# Altium PCB PCB1.PcbDoc
Units mm, origin at the board's own origin, x right, y up, seen from the top; angles counter-clockwise.
Board outline 36.58 x 37.97 mm, 4 copper layers (Top Layer, Internal Plane 1, Internal Plane 2, Bottom Layer); 112 components, 31 nets, 572 pads, 88 vias.
Unrouted connection lines stored in the file: 90.
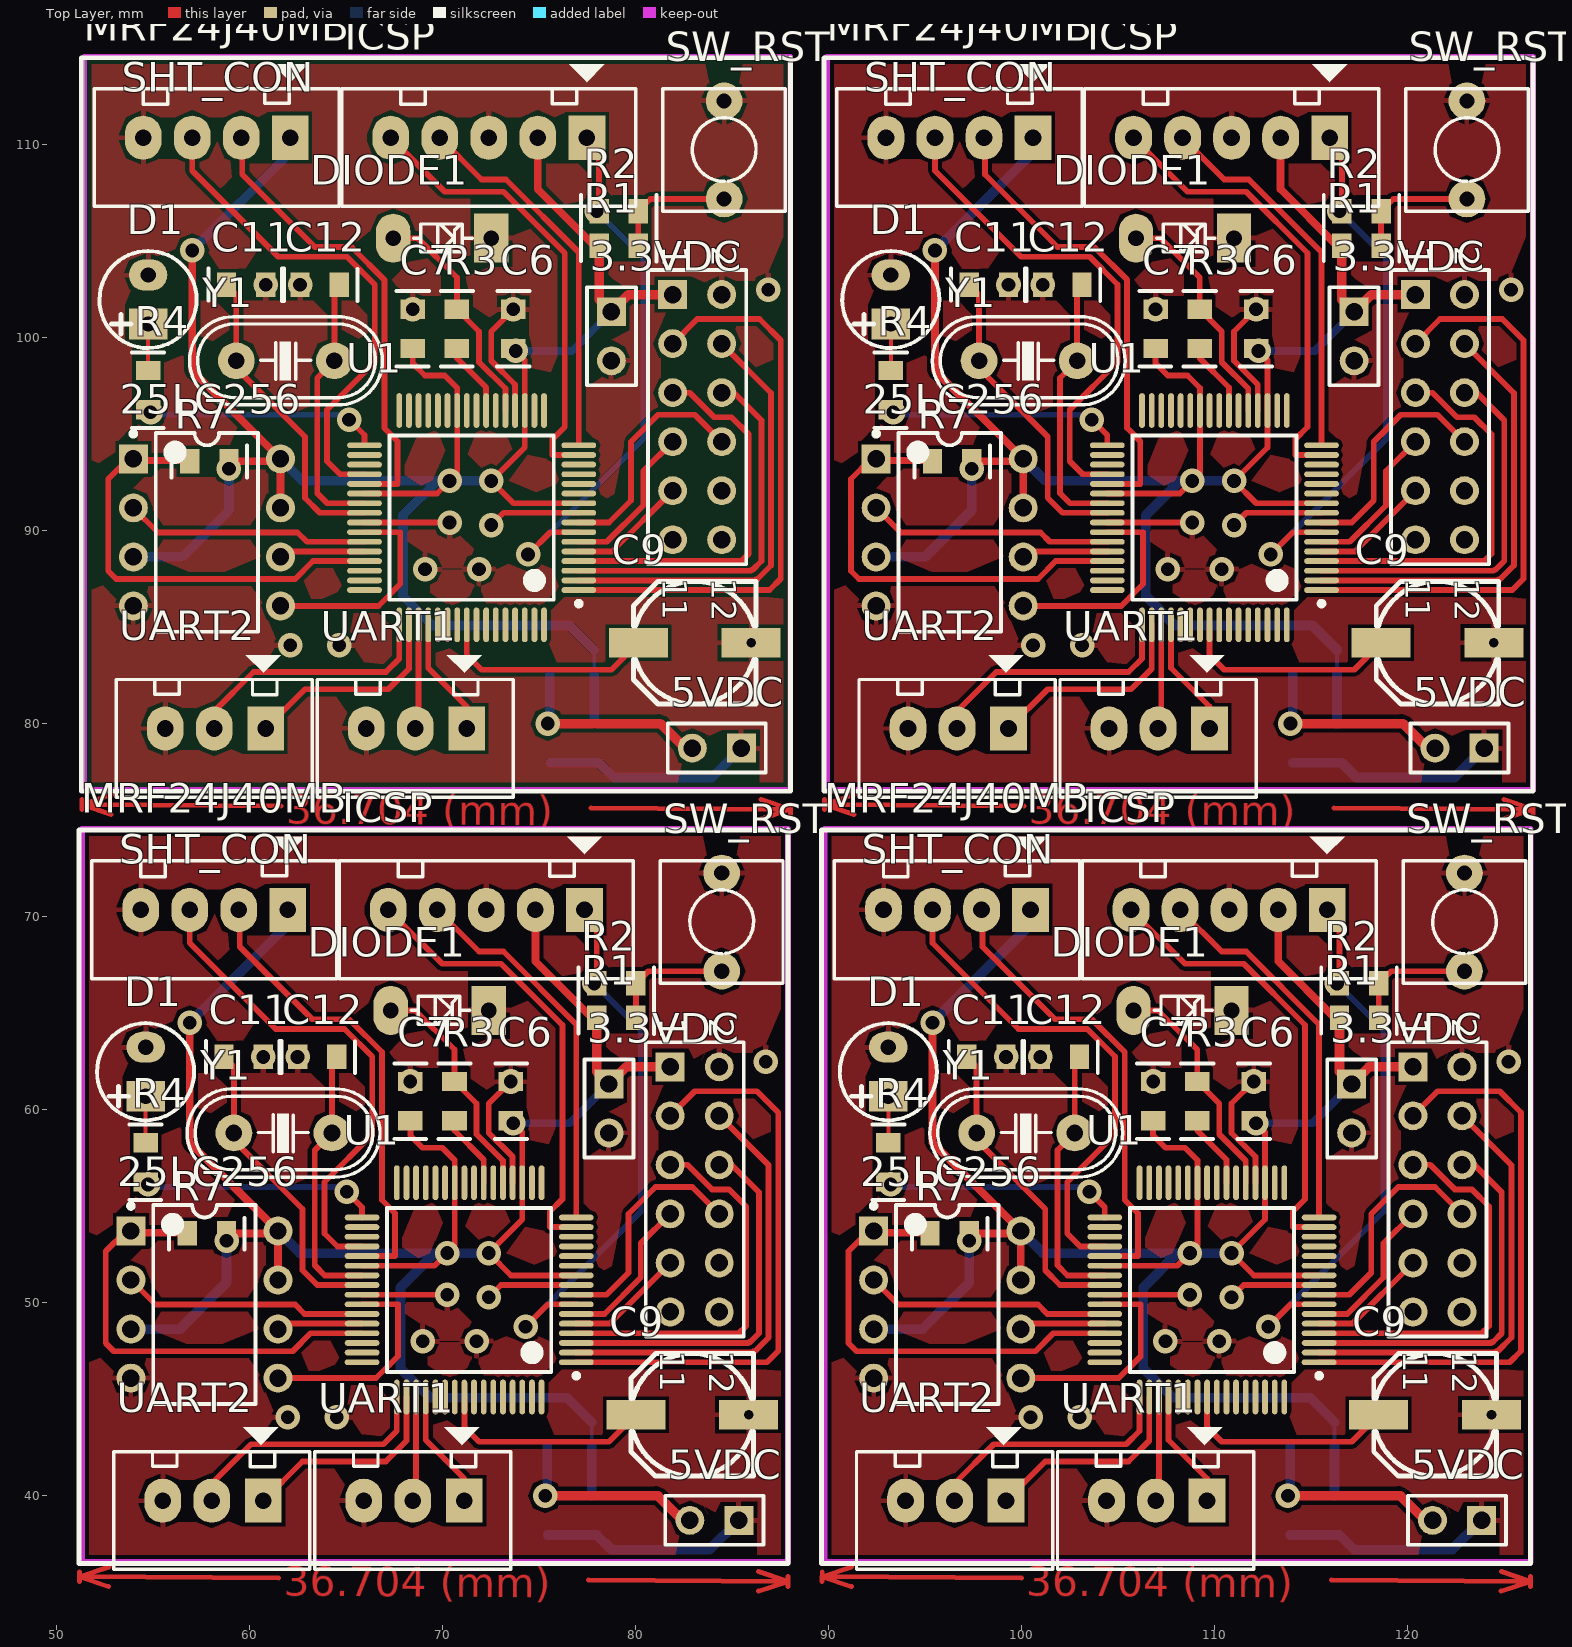
[diagram p0: Top Layer view]
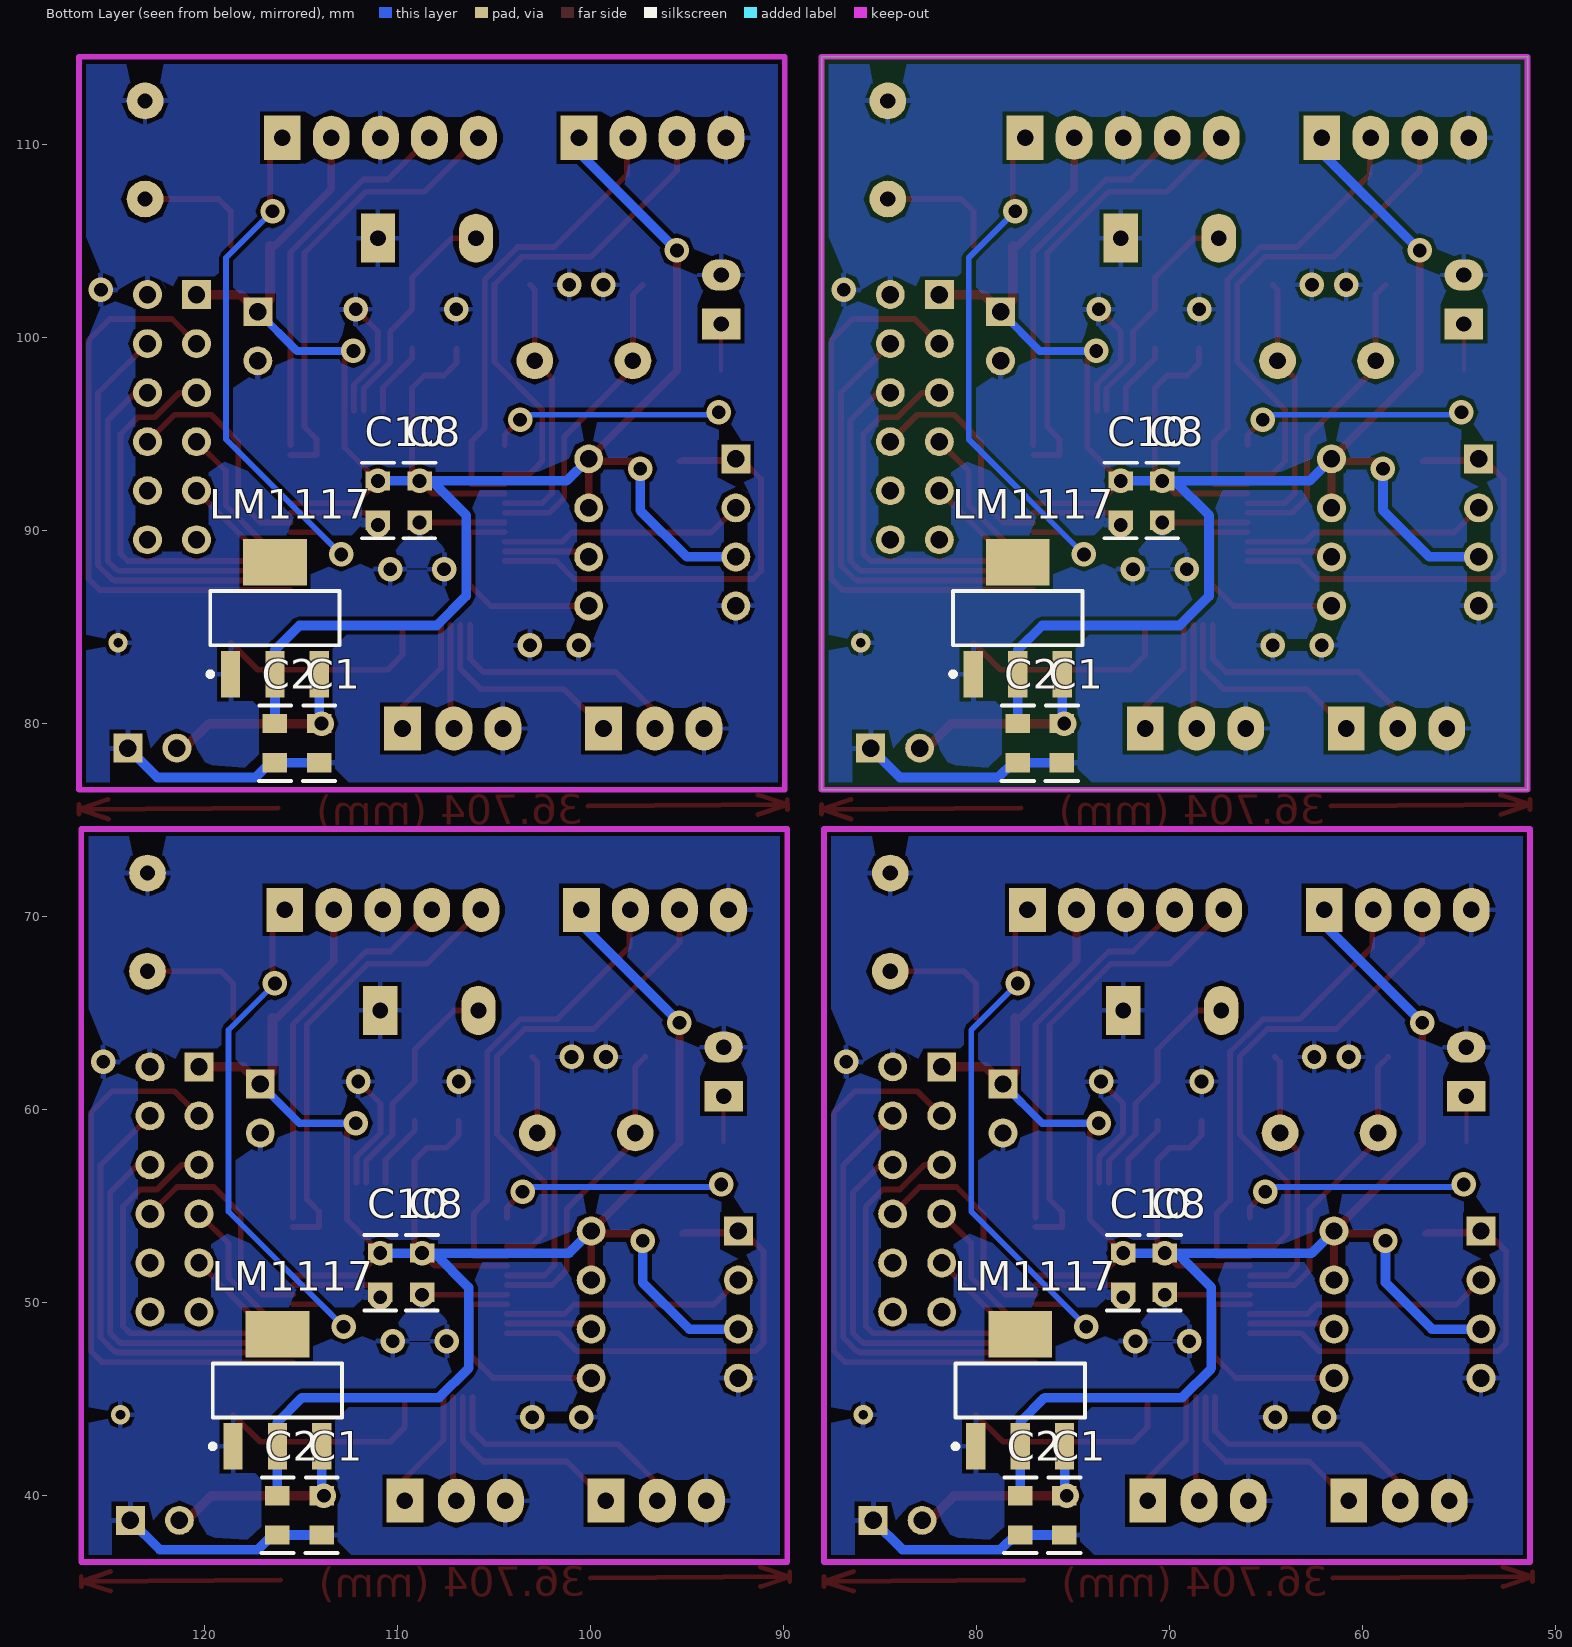
[diagram p1: Bottom Layer view, seen from below]
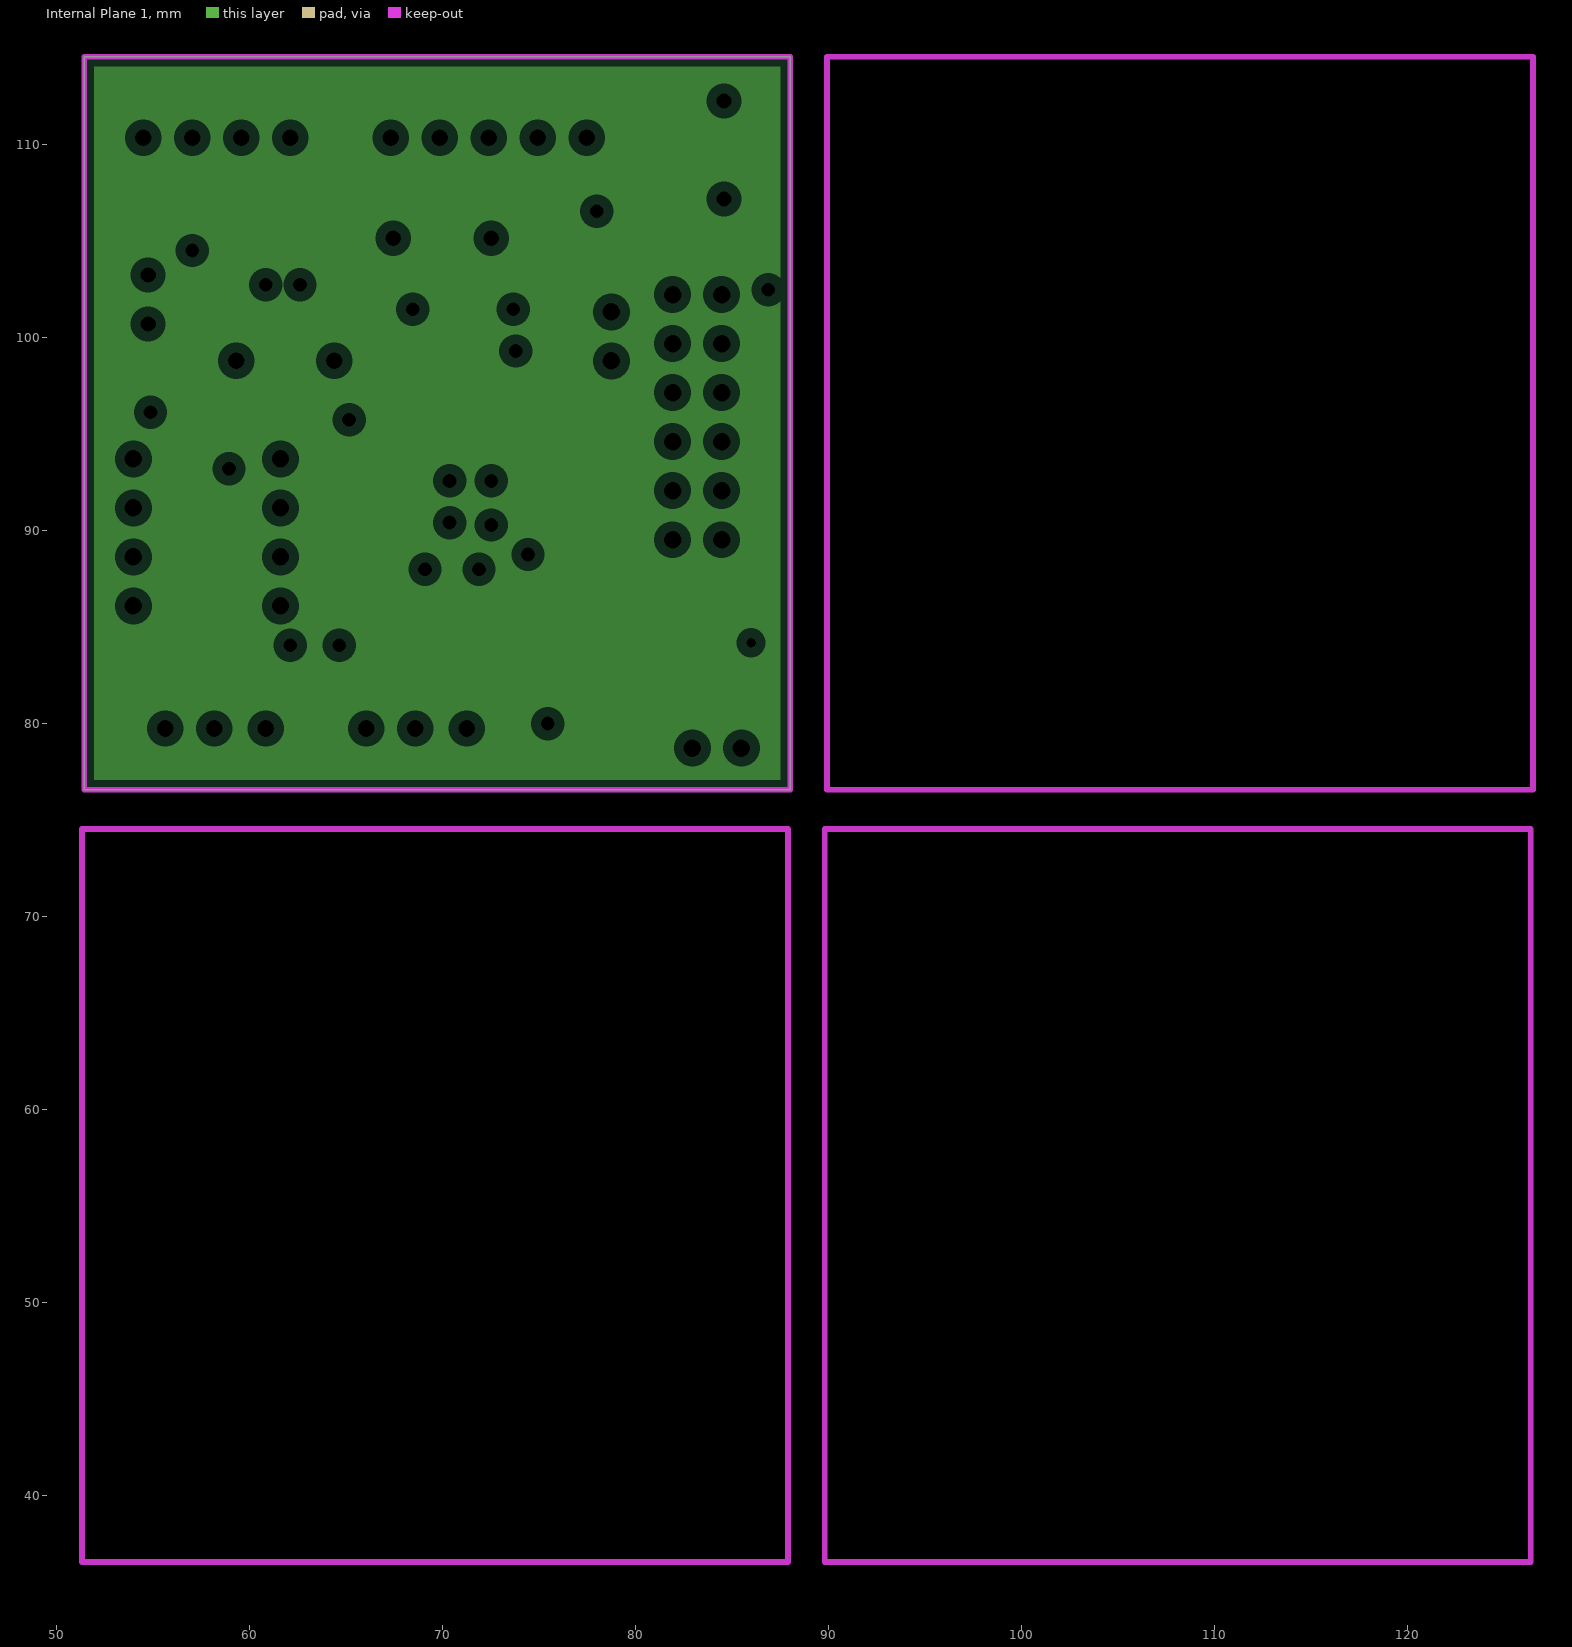
[diagram p2: Internal Plane 1, clearances drawn from the general rule]
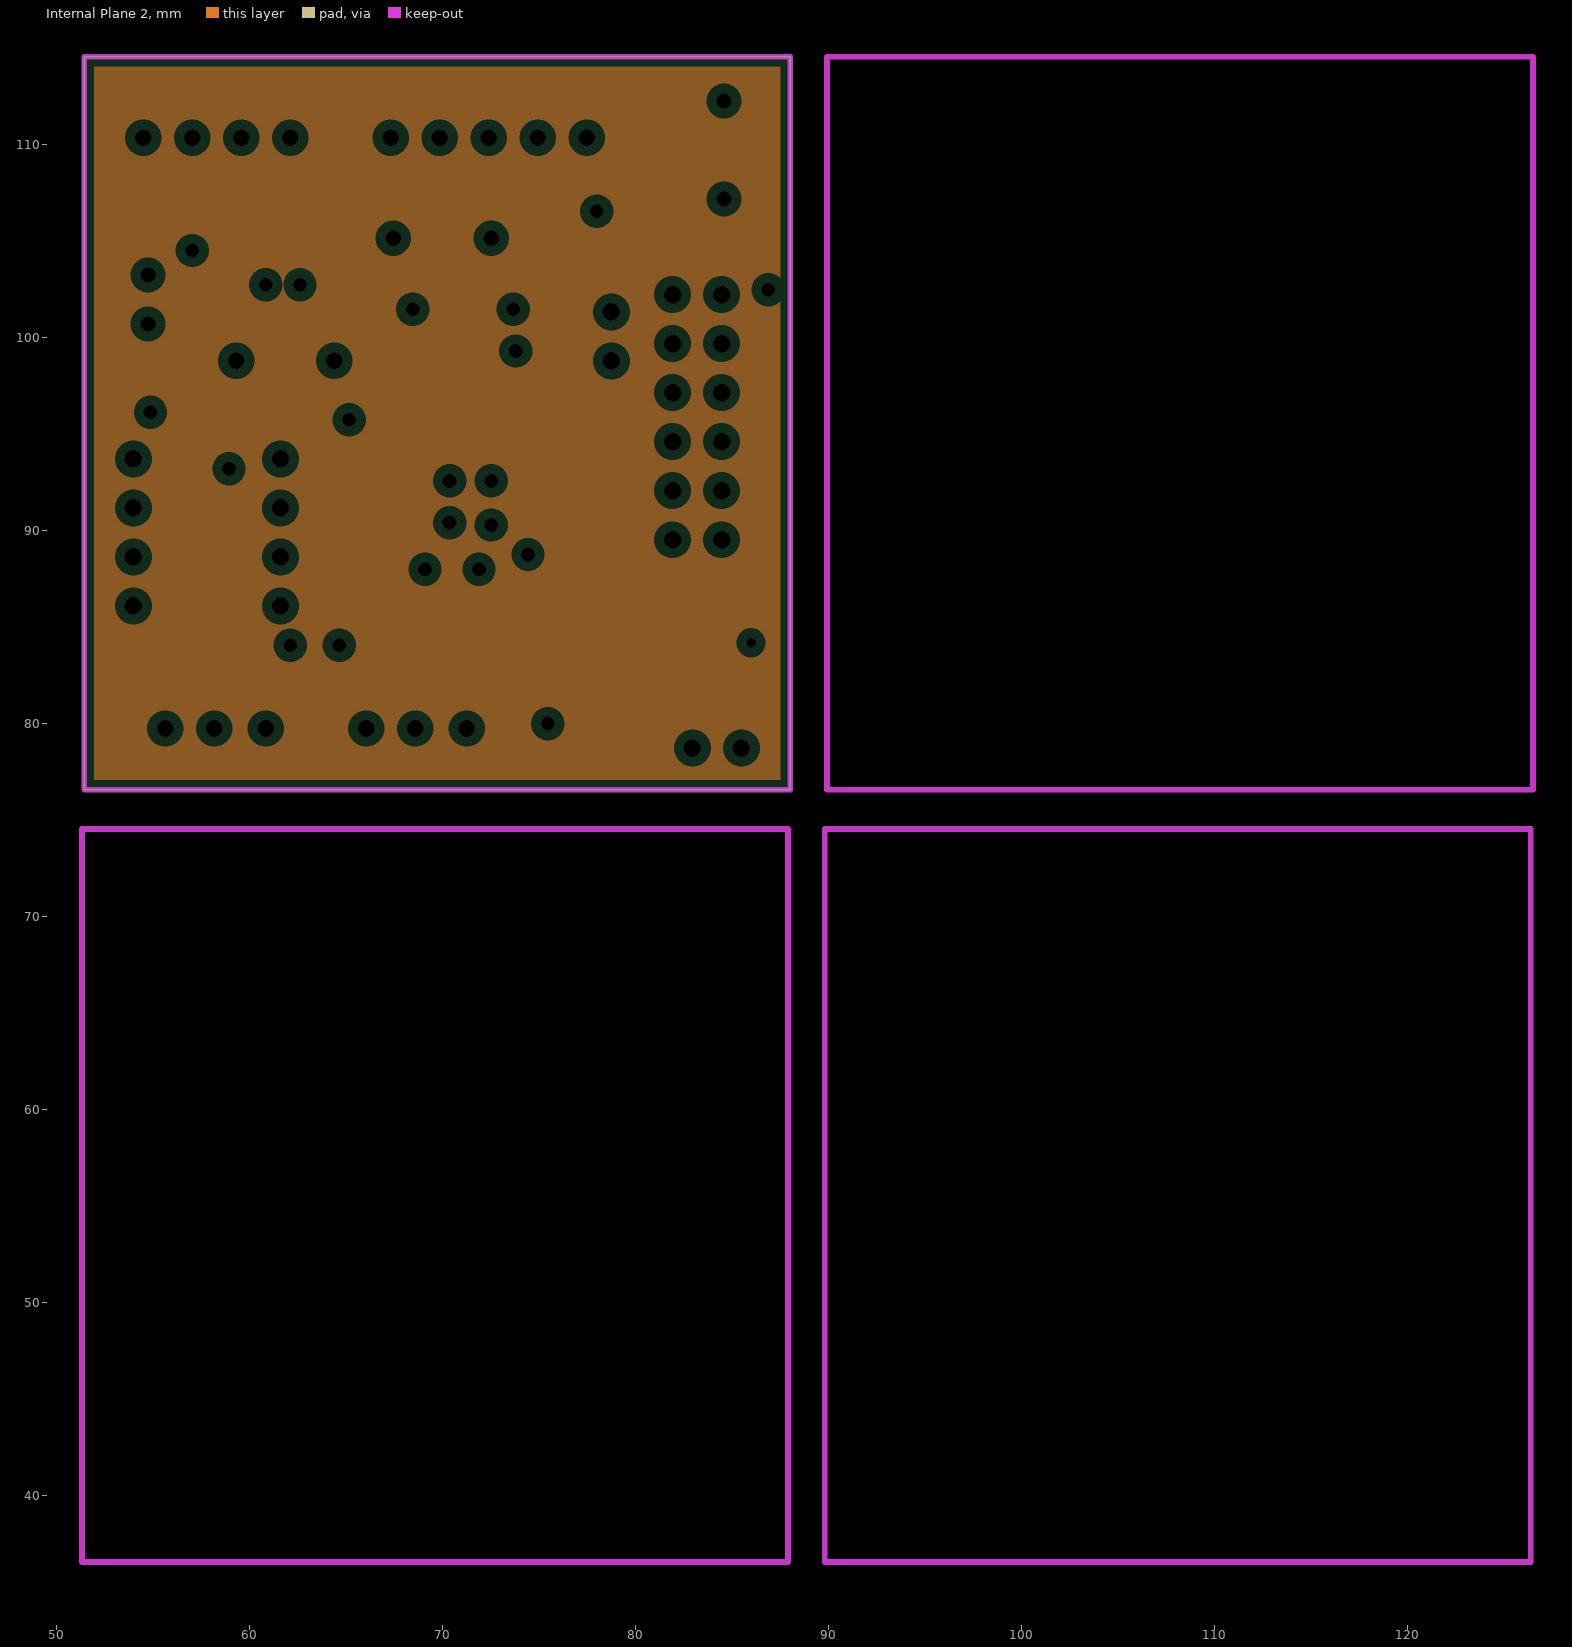
[diagram p3: Internal Plane 2, clearances drawn from the general rule]

## Layer stack, top to bottom
Top Layer: signal copper 0.0356
Dielectric: dielectric 0.32, FR-4, Dk 4.8
Internal Plane 1: plane copper 0.0356
Dielectric: dielectric 0.32, FR-4, Dk 4.8
Internal Plane 2: plane copper 0.0356
Dielectric: dielectric 0.32, FR-4, Dk 4.8
Bottom Layer: signal copper 0.0356

## Board outline
51.435,114.554 88.011,114.554 88.011,76.581 51.435,76.581

## Design rules (kind name [scope] priority, off if disabled: settings)
Clearance [All] p1: gap=0.2
PlaneClearance [All] p1: clearance=0.508
PlaneConnect [All] p1: planeconnectstyle=Relief reliefexpansion=0.508 reliefentries=4 reliefconductorwidth=0.254 reliefairgap=0.254
PolygonConnect [All] p1: connectstyle=Relief reliefconductorwidth=0.254 reliefentries=4 polygonreliefangle="90 Angle"
RoutingVias [All] p1: holewidth=0.6 width=1 viastyle="Through Hole" minholewidth=0.711 minwidth=1.27 maxholewidth=0.711 maxwidth=1.27
SilkscreenOverComponentPads [All] p1: minsilkscreentomaskgap=0.254
SolderMaskExpansion [All] p1: expansion=0.102
Width [All] p1: maxlimit=0.5 minlimit=0.2 preferedwidth=0.3
25 further rules are at their usual default settings.

## Classes and differential pairs
component class Sheet1: 3.3VDC 5VDC 25LC256 C1 C2 C6 C7 C8 C9 C10 C11 C12 D1 DIODE1 ICSP LM1117 MRF24J40MB R1 R2 R3 R4 R7 SHT_CON SW_RST U1 UART1 UART2 Y1

## Components (designator, comment, footprint, x,y, rotation, side; value= is the part's Value field where it differs from the comment)
3.3VDC "Header 2" HDR1X2 117.221,101.346 r270 top
3.3VDC "Header 2" HDR1X2 117.094,61.341 r270 top
3.3VDC "Header 2" HDR1X2 78.613,61.341 r270 top
3.3VDC "Header 2" HDR1X2 78.74,101.346 r270 top
5VDC "Header 2" HDR1X2 123.952,78.74 r180 top
5VDC "Header 2" HDR1X2 123.825,38.735 r180 top
5VDC "Header 2" HDR1X2 85.344,38.735 r180 top
5VDC "Header 2" HDR1X2 85.471,78.74 r180 top
25LC256 "25LC256" DIP-8 96.266,89.916 r0 top
25LC256 "25LC256" DIP-8 96.139,49.911 r0 top
25LC256 "25LC256" DIP-8 57.658,49.911 r0 top
25LC256 "25LC256" DIP-8 57.785,89.916 r0 top
C1 "Cap" C0805 114.046,78.994 r90 bottom
C1 "Cap" C0805 113.919,38.989 r90 bottom
C1 "Cap" C0805 75.438,38.989 r90 bottom
C1 "Cap" C0805 75.565,78.994 r90 bottom
C2 "Cap" C0805 116.332,78.994 r90 bottom
C2 "Cap" C0805 116.205,38.989 r90 bottom
C2 "Cap" C0805 77.724,38.989 r90 bottom
C2 "Cap" C0805 77.851,78.994 r90 bottom
C6 "Cap" C0805 112.141,100.457 r90 top
C6 "Cap" C0805 112.014,60.452 r90 top
C6 "Cap" C0805 73.533,60.452 r90 top
C6 "Cap" C0805 73.66,100.457 r90 top
C7 "Cap" C0805 106.934,100.457 r270 top
C7 "Cap" C0805 106.807,60.452 r270 top
C7 "Cap" C0805 68.326,60.452 r270 top
C7 "Cap" C0805 68.453,100.457 r270 top
C8 "Cap" C0805 108.839,91.567 r270 bottom
C8 "Cap" C0805 108.712,51.562 r270 bottom
C8 "Cap" C0805 70.231,51.562 r270 bottom
C8 "Cap" C0805 70.358,91.567 r270 bottom
C9 "Cap2" "CAP P 6.3x5.4" 121.539,84.201 r180 top
C9 "Cap2" "CAP P 6.3x5.4" 121.412,44.196 r180 top
C9 "Cap2" "CAP P 6.3x5.4" 82.931,44.196 r180 top
C9 "Cap2" "CAP P 6.3x5.4" 83.058,84.201 r180 top
C10 "Cap" C0805 110.998,91.567 r270 bottom
C10 "Cap" C0805 110.871,51.562 r270 bottom
C10 "Cap" C0805 72.39,51.562 r270 bottom
C10 "Cap" C0805 72.517,91.567 r270 bottom
C11 "Cap" C0805 98.298,102.743 r180 top
C11 "Cap" C0805 98.171,62.738 r180 top
C11 "Cap" C0805 59.69,62.738 r180 top
C11 "Cap" C0805 59.817,102.743 r180 top
C12 "Cap" C0805 102.108,102.743 r0 top
C12 "Cap" C0805 101.981,62.738 r0 top
C12 "Cap" C0805 63.5,62.738 r0 top
C12 "Cap" C0805 63.627,102.743 r0 top
D1 "LED nguon" LED3mm 93.218,101.981 r90 top
D1 "LED nguon" LED3mm 93.091,61.976 r90 top
D1 "LED nguon" LED3mm 54.61,61.976 r90 top
D1 "LED nguon" LED3mm 54.737,101.981 r90 top
DIODE1 "Diode" DZ0.5A 105.918,105.156 r180 top
DIODE1 "Diode" DZ0.5A 105.791,65.151 r180 top
DIODE1 "Diode" DZ0.5A 67.31,65.151 r180 top
DIODE1 "Diode" DZ0.5A 67.437,105.156 r180 top
ICSP "ICSP" CON5 115.951,110.363 r180 top
ICSP "ICSP" CON5 115.824,70.358 r180 top
ICSP "ICSP" CON5 77.343,70.358 r180 top
ICSP "ICSP" CON5 77.47,110.363 r180 top
LM1117 "LM317" SOT223-4N 116.332,85.471 r90 bottom
LM1117 "LM317" SOT223-4N 116.205,45.466 r90 bottom
LM1117 "LM317" SOT223-4N 77.724,45.466 r90 bottom
LM1117 "LM317" SOT223-4N 77.851,85.471 r90 bottom
MRF24J40MB "Header 6X2" MRF24J40MB_board_mini 124.206,103.505 r180 top locked
MRF24J40MB "Header 6X2" MRF24J40MB_board_mini 124.079,63.5 r180 top locked
MRF24J40MB "Header 6X2" MRF24J40MB_board_mini 85.598,63.5 r180 top locked
MRF24J40MB "Header 6X2" MRF24J40MB_board_mini 85.725,103.505 r180 top locked
R1 "Res1" C0805 117.602,104.775 r180 top
R1 "Res1" C0805 117.475,64.77 r180 top
R1 "Res1" C0805 78.994,64.77 r180 top
R1 "Res1" C0805 79.121,104.775 r180 top
R2 "res" C0805 117.602,106.553 r180 top
R2 "res" C0805 117.475,66.548 r180 top
R2 "res" C0805 78.994,66.548 r180 top
R2 "res" C0805 79.121,106.553 r180 top
R3 "Res1" C0805 109.22,100.457 r270 top
R3 "Res1" C0805 109.093,60.452 r270 top
R3 "Res1" C0805 70.612,60.452 r270 top
R3 "Res1" C0805 70.739,100.457 r270 top
R4 "Res1" C0805 93.218,97.282 r270 top
R4 "Res1" C0805 93.091,57.277 r270 top
R4 "Res1" C0805 54.61,57.277 r270 top
R4 "Res1" C0805 54.737,97.282 r270 top
R7 "Res Semi" C0805 96.393,93.599 r0 top
R7 "Res Semi" C0805 96.266,53.594 r0 top
R7 "Res Semi" C0805 57.785,53.594 r0 top
R7 "Res Semi" C0805 57.912,93.599 r0 top
SHT_CON "SHT10 conector" CON4 100.584,110.363 r180 top
SHT_CON "SHT10 conector" CON4 100.457,70.358 r180 top
SHT_CON "SHT10 conector" CON4 61.976,70.358 r180 top
SHT_CON "SHT10 conector" CON4 62.103,110.363 r180 top
SW_RST "SW" SW2 123.063,112.268 r270 top
SW_RST "SW" SW2 122.936,72.263 r270 top
SW_RST "SW" SW2 84.455,72.263 r270 top
SW_RST "SW" SW2 84.582,112.268 r270 top
U1 "PIC24FJ128GA306" TQFP-PT64_N 109.982,90.678 r180 top
U1 "PIC24FJ128GA306" TQFP-PT64_N 109.855,50.673 r180 top
U1 "PIC24FJ128GA306" TQFP-PT64_N 71.374,50.673 r180 top
U1 "PIC24FJ128GA306" TQFP-PT64_N 71.501,90.678 r180 top
UART1 "UART1" CON3 109.601,79.756 r180 top
UART1 "UART1" CON3 109.474,39.751 r180 top
UART1 "UART1" CON3 70.993,39.751 r180 top
UART1 "UART1" CON3 71.12,79.756 r180 top
UART2 "UART2" CON3 99.187,79.756 r180 top
UART2 "UART2" CON3 99.06,39.751 r180 top
UART2 "UART2" CON3 60.579,39.751 r180 top
UART2 "UART2" CON3 60.706,79.756 r180 top
Y1 "XTAL" XT2 100.33,98.806 r180 top
Y1 "XTAL" XT2 100.203,58.801 r180 top
Y1 "XTAL" XT2 61.722,58.801 r180 top
Y1 "XTAL" XT2 61.849,98.806 r180 top

## Footprints (in the part's own frame and the unit in brackets; to place one, negate y for a bottom-side part, rotate by r counter-clockwise, add the part's x,y. Pads: shape width x height; smd on the part's side, far side on the other; paste and mask are expansions set on the pad)
C0805 [mm] "Chip Resistor; Body 2.0 x 1.3 mm (LxW typ)"
  rect 1x1.27 smd: 1(-1.016,0) 2(1.016,0)
  silkscreen extent -1.96,-0.84 1.96,0.84, body extent -1,-0.62 1,0.63, height 0.78
"CAP P 6.3x5.4" [mil]
  rect 120x60 smd: 1(115,0) 2(-115,0)
  silkscreen extent -125,-125 125,125, body extent -138,-130 138,130, height 213
CON3 [mil] "CON 3"
  rect 75x90 hole 34: 1(-5,0)
  oval 75x90 hole 34: 2(100,0) 3(200,0)
  silkscreen extent -100,-150 300,140, body extent -95,-90 295,136, height 276
CON4 [mil] "CON4"
  rect 75x90 hole 34: 1(0,0)
  oval 75x90 hole 34: 2(100,0) 3(200,0) 4(300,0)
  silkscreen extent -100,-150 400,140, body extent -90,-90 398,136, height 276
CON5 [mil] "CON5"
  rect 75x90 hole 34: 1(0,0)
  oval 75x90 hole 34: 2(100,0) 3(200,0) 4(300,0) 5(400,0)
  silkscreen extent -100,-150 500,140
DIP-8 [mm] "DIP; 8 Leads; Row Spacing 7.62 mm; Pitch 2.54 mm"
  rect 1.5x1.5 hole 0.9: 1(-3.81,3.81)
  round 1.5 hole 0.9: 2(-3.81,1.27) 3(-3.81,-1.27) 4(-3.81,-3.81) 5(3.81,-3.81) 6(3.81,-1.27) 7(3.81,1.27) 8(3.81,3.81)
  silkscreen extent -3.93,-5.15 2.65,5.23, body extent -3.6,-5.15 3.6,5.15, height 5.08
DZ0.5A [mil] "Diode Zenner, W 80mil, L 300mil"
  oval 70x100 hole 32: 1(0,0)
  rect 70x100 hole 32: 2(-200,0)
  silkscreen extent -161,-29 -42,28
HDR1X2 [mm] "Connector; Header; 2 Position"
  rect 1.5x1.5 hole 0.9: 1(0,0)
  round 1.5 hole 0.9: 2(2.54,0)
  silkscreen extent -1.27,-1.27 3.81,1.27
LED3mm [mm]
  rect 1.6x2 hole 0.8: 1(-1.27,0)
  oval 1.6x2 hole 0.8: 2(1.27,0)
  silkscreen extent -2.52,-2.51 2.51,2.52, body extent -1.99,-1.5 1.99,1.99, height 5.38
MRF24J40MB_board_mini [mm]
  rect 1.5x1.5 hole 0.9: 1(3.81,1.27)
  round 1.5 hole 0.9: 2(1.27,1.27) 3(3.81,3.81) 4(1.27,3.81) 5(3.81,6.35) 6(1.27,6.35) 7(3.81,8.89) 8(1.27,8.89) 9(3.81,11.43) 10(1.27,11.43) 11(3.81,13.97) 12(1.27,13.97)
  silkscreen extent -2.29,-11 34.45,27, body extent 0,0 5.08,15.24, height 7
SOT223-4N [mm] "SOT223, 4-Leads, Body 6.5x3.5mm, Pitch 2.3mm, Lead Span 7mm, IPC Medium Density"
  rect 2.4x1 smd: 1(-2.9,2.3) 2(-2.9,0) 3(-2.9,-2.3)
  rect 2.4x3.3 smd: 4(2.9,0)
  silkscreen extent -3.02,-3.35 1.4,3.48, body extent -3.39,-3.27 3.5,3.23, height 1.72
SW2 [mil] "SW button 2pin, 250x 250 mil"
  round 75 hole 31: 1(0,0) 2(200,0)
  silkscreen extent -25,-125 225,125
TQFP-PT64_N [mm] "Thin QFP, 64-Leads, Body 10x10mm, Pitch 0.5mm, IPC Medium Density"
  oval 1.8x0.3 smd: 1(-5.55,3.75) 2(-5.55,3.25) 3(-5.55,2.75) 4(-5.55,2.25) 5(-5.55,1.75) 6(-5.55,1.25) 7(-5.55,0.75) 8(-5.55,0.25) 9(-5.55,-0.25) 10(-5.55,-0.75) 11(-5.55,-1.25) 12(-5.55,-1.75) 13(-5.55,-2.25) 14(-5.55,-2.75) 15(-5.55,-3.25) 16(-5.55,-3.75) 33(5.55,-3.75) 34(5.55,-3.25) 35(5.55,-2.75) 36(5.55,-2.25) 37(5.55,-1.75) 38(5.55,-1.25) 39(5.55,-0.75) 40(5.55,-0.25) 41(5.55,0.25) 42(5.55,0.75) 43(5.55,1.25) 44(5.55,1.75) 45(5.55,2.25) 46(5.55,2.75) 47(5.55,3.25) 48(5.55,3.75)
  oval 0.3x1.8 smd: 17(-3.75,-5.55) 18(-3.25,-5.55) 19(-2.75,-5.55) 20(-2.25,-5.55) 21(-1.75,-5.55) 22(-1.25,-5.55) 23(-0.75,-5.55) 24(-0.25,-5.55) 25(0.25,-5.55) 26(0.75,-5.55) 27(1.25,-5.55) 28(1.75,-5.55) 29(2.25,-5.55) 30(2.75,-5.55) 31(3.25,-5.55) 32(3.75,-5.55) 49(3.75,5.55) 50(3.25,5.55) 51(2.75,5.55) 52(2.25,5.55) 53(1.75,5.55) 54(1.25,5.55) 55(0.75,5.55) 56(0.25,5.55) 57(-0.25,5.55) 58(-0.75,5.55) 59(-1.25,5.55) 60(-1.75,5.55) 61(-2.25,5.55) 62(-2.75,5.55) 63(-3.25,5.55) 64(-3.75,5.55)
  silkscreen extent -5.68,-4.25 4.25,4.57, body extent -5,-5 5,5, height 1.2
XT2 [mil] "Footpin for Crystal 2 pin"
  round 75 hole 34: 1(-100,0) 2(100,0)
  silkscreen extent -198,-90 195,90, body extent -233,-93 213,90, height 138

## Part data
3.3VDC 3.3VDC 3.3VDC 3.3VDC 5VDC 5VDC 5VDC 5VDC: "Header, 2-Pin"
C1 C1 C1 C1 C2 C2 C2 C2 C6 C6 C6 C6 C7 C7 C7 C7 C8 C8 C8 C8 C9 C9 C9 C9 C10 C10 C10 C10 C11 C11 C11 C11 C12 C12 C12 C12: "Capacitor"
D1 D1 D1 D1: library part LED0, "Typical INFRARED GaAs LED"
DIODE1 DIODE1 DIODE1 DIODE1: "Default Diode"
ICSP ICSP ICSP ICSP: library part "Header 5", "Header, 5-Pin"
LM1117 LM1117 LM1117 LM1117: "Adj Voltage +1.2 -> +37V"
MRF24J40MB MRF24J40MB MRF24J40MB MRF24J40MB: "Header, 6-Pin, Dual row"
R1 R1 R1 R1 R3 R3 R3 R3 R4 R4 R4 R4: "Resistor"
R2 R2 R2 R2: library part Res1, "Resistor"
R7 R7 R7 R7: "Semiconductor Resistor"
SHT_CON SHT_CON SHT_CON SHT_CON: library part "Header 4", "Header, 4-Pin"
SW_RST SW_RST SW_RST SW_RST: library part SW2, "Switch button 2 pin"
UART1 UART1 UART1 UART1 UART2 UART2 UART2 UART2: library part Con3, "Connector 3"
Y1 Y1 Y1 Y1: "Crystal Oscillator"

## Via types
v1: diameter 1.27, hole 0.711, Top Layer to Bottom Layer, 84 vias
v2: diameter 1, hole 0.5, Top Layer to Bottom Layer, 4 vias

## Nets (pads, with @x,y where several pads share a name; then routed paths per layer and width w, separated by ;. In a path a pad name is that pad's centre, name@x,y a point inside that pad or via, vN(x,y) a via of type N, cw(c..) or ccw(c..) an arc to the next point about the centre after c; other vN are vias at no path point)
3.3VDC: 3.3VDC.1 25LC256.3 25LC256.7 25LC256.8 C2.2 C6.1 C7.2 C8.1 C10.1 ICSP.2 LM1117.2 MRF24J40MB.1 R1.2 R7.2 SHT_CON.1 U1.10 U1.19 U1.26 U1.38 | length 451.8
  Top Layer w0.2: C6.1@73.533,59.436 v1(73.66,59.309) ; C6.1@73.66,99.441 v1(73.787,99.314) ; C6.1@112.014,59.436 v1(112.141,59.309) ; C6.1@112.141,99.441 v1(112.268,99.314)
  Top Layer w0.3: U1.38@65.824,51.923 69.576,51.923 v1(70.231,52.578) 70.624,52.971 70.624,56.223 70.624,57.392 69.977,58.039 68.961,58.039 68.326,58.674 C7.2@68.326,59.436 ; U1.38@65.951,91.928 69.703,91.928 v1(70.358,92.583) 70.751,92.976 70.751,96.228 70.751,97.397 70.104,98.044 69.088,98.044 68.453,98.679 C7.2@68.453,99.441 ; v1(73.66,59.309) 74.124,58.845 74.124,56.223 74.124,54.312 v1(72.39,52.578) 73.545,51.423 U1.10@76.924,51.423 ; v1(73.787,99.314) 74.251,98.85 74.251,96.228 74.251,94.317 v1(72.517,92.583) 73.672,91.428 U1.10@77.051,91.428 ; U1.38@104.305,51.923 108.057,51.923 v1(108.712,52.578) 109.105,52.971 109.105,56.223 109.105,57.392 108.458,58.039 107.442,58.039 106.807,58.674 C7.2@106.807,59.436 ; U1.38@104.432,91.928 108.184,91.928 v1(108.839,92.583) 109.232,92.976 109.232,96.228 109.232,97.397 108.585,98.044 107.569,98.044 106.934,98.679 C7.2@106.934,99.441 ; v1(112.141,59.309) 112.605,58.845 112.605,56.223 112.605,54.312 v1(110.871,52.578) 112.026,51.423 U1.10@115.405,51.423 ; v1(112.268,99.314) 112.732,98.85 112.732,96.228 112.732,94.317 v1(110.998,92.583) 112.153,91.428 U1.10@115.532,91.428
  Top Layer w0.4: v1(56.896,64.516) 56.896,58.293 61.468,53.721 25LC256.7@61.468,51.181 ; v1(57.023,104.521) 57.023,98.298 61.595,93.726 25LC256.7@61.595,91.186 ; R7.2@58.801,53.594 25LC256.8@61.341,53.594 ; R7.2@58.928,93.599 25LC256.8@61.468,93.599 ; ICSP.2@74.803,70.358 74.803,67.691 77.724,64.77 R1.2@77.978,64.77 ; ICSP.2@74.93,110.363 74.93,107.696 77.851,104.775 R1.2@78.105,104.775 ; v1(95.377,64.516) 95.377,58.293 99.949,53.721 25LC256.7@99.949,51.181 ; v1(95.504,104.521) 95.504,98.298 100.076,93.726 25LC256.7@100.076,91.186 ; R7.2@97.282,53.594 25LC256.8@99.822,53.594 ; R7.2@97.409,93.599 25LC256.8@99.949,93.599 ; ICSP.2@113.284,70.358 113.284,67.691 116.205,64.77 R1.2@116.459,64.77 ; ICSP.2@113.411,110.363 113.411,107.696 116.332,104.775 R1.2@116.586,104.775
  Top Layer w0.5: R1.2@77.978,64.77 77.978,61.976 78.613,61.341 79.502,62.23 MRF24J40MB.1@81.788,62.23 ; R1.2@78.105,104.775 78.105,101.981 78.74,101.346 79.629,102.235 MRF24J40MB.1@81.915,102.235 ; R1.2@116.459,64.77 116.459,61.976 117.094,61.341 117.983,62.23 MRF24J40MB.1@120.269,62.23 ; R1.2@116.586,104.775 116.586,101.981 117.221,101.346 118.11,102.235 MRF24J40MB.1@120.396,102.235
  Bottom Layer w0.2: SHT_CON.1@61.976,69.596 SHT_CON.1@61.976,70.358 ; SHT_CON.1@62.103,109.601 SHT_CON.1@62.103,110.363 ; LM1117.2@77.724,42.566 77.724,43.815 ; LM1117.2@77.851,82.571 77.851,83.82 ; SHT_CON.1@100.457,69.596 SHT_CON.1@100.457,70.358 ; SHT_CON.1@100.584,109.601 SHT_CON.1@100.584,110.363 ; LM1117.2@116.205,42.566 116.205,43.815 ; LM1117.2@116.332,82.571 116.332,83.82
  Bottom Layer w0.4: v1(73.66,59.309) 76.581,59.309 3.3VDC.1@78.613,61.341 ; v1(73.787,99.314) 76.708,99.314 3.3VDC.1@78.74,101.346 ; v1(112.141,59.309) 115.062,59.309 3.3VDC.1@117.094,61.341 ; v1(112.268,99.314) 115.189,99.314 3.3VDC.1@117.221,101.346
  Bottom Layer w0.5: 25LC256.3@53.848,48.641 56.388,48.641 58.801,51.054 v1(58.801,53.213) ; 25LC256.3@53.975,88.646 56.515,88.646 58.928,91.059 v1(58.928,93.218) ; v1(56.896,64.516) SHT_CON.1@61.976,69.596 ; v1(57.023,104.521) SHT_CON.1@62.103,109.601 ; 25LC256.8@61.468,53.721 62.611,52.578 C8.1@69.596,52.578 ; 25LC256.8@61.595,93.726 62.738,92.583 C8.1@69.723,92.583 ; v1(72.39,52.578) v1(70.231,52.578) C8.1@69.596,52.578 ; v1(72.517,92.583) v1(70.358,92.583) C8.1@69.723,92.583 ; C2.2@77.724,40.005 LM1117.2@77.724,42.566 ; 77.724,43.815 76.454,45.085 69.342,45.085 67.818,46.609 67.818,50.8 C8.1@69.596,52.578 ; C2.2@77.851,80.01 LM1117.2@77.851,82.571 ; 77.851,83.82 76.581,85.09 69.469,85.09 67.945,86.614 67.945,90.805 C8.1@69.723,92.583 ; 25LC256.3@92.329,48.641 94.869,48.641 97.282,51.054 v1(97.282,53.213) ; 25LC256.3@92.456,88.646 94.996,88.646 97.409,91.059 v1(97.409,93.218) ; v1(95.377,64.516) SHT_CON.1@100.457,69.596 ; v1(95.504,104.521) SHT_CON.1@100.584,109.601 ; 25LC256.8@99.949,53.721 101.092,52.578 C8.1@108.077,52.578 ; 25LC256.8@100.076,93.726 101.219,92.583 C8.1@108.204,92.583 ; v1(110.871,52.578) v1(108.712,52.578) C8.1@108.077,52.578 ; v1(110.998,92.583) v1(108.839,92.583) C8.1@108.204,92.583 ; C2.2@116.205,40.005 LM1117.2@116.205,42.566 ; 116.205,43.815 114.935,45.085 107.823,45.085 106.299,46.609 106.299,50.8 C8.1@108.077,52.578 ; C2.2@116.332,80.01 LM1117.2@116.332,82.571 ; 116.332,83.82 115.062,85.09 107.95,85.09 106.426,86.614 106.426,90.805 C8.1@108.204,92.583
5VDC: 5VDC.2 C1.2 LM1117.3 | length 42.3
  Top Layer w0.2: 5VDC.2@82.423,38.735 5VDC.2@82.804,38.735 ; 5VDC.2@82.55,78.74 5VDC.2@82.931,78.74 ; 5VDC.2@120.904,38.735 5VDC.2@121.285,38.735 ; 5VDC.2@121.031,78.74 5VDC.2@121.412,78.74
  Top Layer w0.5: v1(75.311,40.005) 81.153,40.005 5VDC.2@82.423,38.735 ; v1(75.438,80.01) 81.28,80.01 5VDC.2@82.55,78.74 ; v1(113.792,40.005) 119.634,40.005 5VDC.2@120.904,38.735 ; v1(113.919,80.01) 119.761,80.01 5VDC.2@121.031,78.74
  Bottom Layer w0.2: C1.2@75.424,40.019 C1.2@75.438,40.005 ; C1.2@75.551,80.024 C1.2@75.565,80.01 ; C1.2@113.905,40.019 C1.2@113.919,40.005 ; C1.2@114.032,80.024 C1.2@114.046,80.01
  Bottom Layer w0.5: C1.2@75.424,40.019 LM1117.3@75.424,42.566 ; C1.2@75.551,80.024 LM1117.3@75.551,82.571 ; C1.2@113.905,40.019 LM1117.3@113.905,42.566 ; C1.2@114.032,80.024 LM1117.3@114.032,82.571
AN8: DIODE1.1 R3.1 U1.21 | length 48.3
  Top Layer w0.3: DIODE1.1@67.31,65.151 68.58,65.151 70.612,63.119 70.612,61.468 71.755,60.325 71.755,58.73 73.124,57.361 U1.21@73.124,56.223 ; DIODE1.1@67.437,105.156 68.707,105.156 70.739,103.124 70.739,101.473 71.882,100.33 71.882,98.735 73.251,97.366 U1.21@73.251,96.228 ; DIODE1.1@105.791,65.151 107.061,65.151 109.093,63.119 109.093,61.468 110.236,60.325 110.236,58.73 111.605,57.361 U1.21@111.605,56.223 ; DIODE1.1@105.918,105.156 107.188,105.156 109.22,103.124 109.22,101.473 110.363,100.33 110.363,98.735 111.732,97.366 U1.21@111.732,96.228
CS1: MRF24J40MB.6 U1.3 | length 78.3
  Top Layer w0.3: U1.3@76.924,47.923 85.833,47.923 85.883,47.973 ; U1.3@77.051,87.928 85.96,87.928 86.01,87.978 ; MRF24J40MB.6@84.328,57.15 84.963,57.15 86.387,55.726 86.387,48.427 85.933,47.973 ; MRF24J40MB.6@84.455,97.155 85.09,97.155 86.514,95.731 86.514,88.432 86.06,87.978 ; U1.3@115.405,47.923 124.314,47.923 124.364,47.973 ; U1.3@115.532,87.928 124.441,87.928 124.491,87.978 ; MRF24J40MB.6@122.809,57.15 123.444,57.15 124.868,55.726 124.868,48.427 124.414,47.973 ; MRF24J40MB.6@122.936,97.155 123.571,97.155 124.995,95.731 124.995,88.432 124.541,87.978
CS2: 25LC256.1 R7.1 U1.45 | length 104.4
  Top Layer w0.2: 25LC256.1@53.848,53.721 R7.1@56.642,53.721 ; 25LC256.1@53.975,93.726 R7.1@56.769,93.726 ; 25LC256.1@92.329,53.721 R7.1@95.123,53.721 ; 25LC256.1@92.456,93.726 R7.1@95.25,93.726
  Top Layer w0.3: R7.1@56.769,53.594 53.975,53.594 53.848,53.721 53.594,53.721 52.544,52.671 52.544,47.913 52.959,47.498 62.23,47.498 63.155,48.423 U1.45@65.824,48.423 ; R7.1@56.896,93.599 54.102,93.599 53.975,93.726 53.721,93.726 52.671,92.676 52.671,87.918 53.086,87.503 62.357,87.503 63.282,88.428 U1.45@65.951,88.428 ; R7.1@95.25,53.594 92.456,53.594 92.329,53.721 92.075,53.721 91.025,52.671 91.025,47.913 91.44,47.498 100.711,47.498 101.636,48.423 U1.45@104.305,48.423 ; R7.1@95.377,93.599 92.583,93.599 92.456,93.726 92.202,93.726 91.152,92.676 91.152,87.918 91.567,87.503 100.838,87.503 101.763,88.428 U1.45@104.432,88.428
GND: 3.3VDC.2 5VDC.1 25LC256.4 C1.1 C2.1 C6.2 C7.1 C8.2 C9.2 C10.2 C11.1 C12.1 D1.2 DIODE1.2 ICSP.3 LM1117.1 MRF24J40MB.2 SHT_CON.4 SW_RST.1 U1.9 U1.20 U1.25 U1.41 UART1.3 UART2.3 | length 106.2
  Top Layer w0.2: v1@70.227,50.423 v1(70.231,50.419) ; v1@70.354,90.428 v1(70.358,90.424) ; v1@108.708,50.423 v1(108.712,50.419) ; v1@108.835,90.428 v1(108.839,90.424)
  Top Layer w0.3: U1.41@65.824,50.423 v1@70.227,50.423 ; U1.41@65.951,90.428 v1@70.354,90.428 ; v1(72.39,50.292) 73.021,50.923 U1.9@76.924,50.923 ; v1(72.517,90.297) 73.148,90.928 U1.9@77.051,90.928 ; v1(73.533,61.468) 72.39,60.325 72.39,58.802 73.624,57.568 U1.20@73.624,56.223 ; v1(73.66,101.473) 72.517,100.33 72.517,98.807 73.751,97.573 U1.20@73.751,96.228 ; U1.41@104.305,50.423 v1@108.708,50.423 ; U1.41@104.432,90.428 v1@108.835,90.428 ; v1(110.871,50.292) 111.502,50.923 U1.9@115.405,50.923 ; v1(110.998,90.297) 111.629,90.928 U1.9@115.532,90.928 ; v1(112.014,61.468) 110.871,60.325 110.871,58.802 112.105,57.568 U1.20@112.105,56.223 ; v1(112.141,101.473) 110.998,100.33 110.998,98.807 112.232,97.573 U1.20@112.232,96.228
  Bottom Layer w0.2: v1(72.39,50.292) C10.2@72.39,50.546 ; v1(72.517,90.297) C10.2@72.517,90.551 ; v1(110.871,50.292) C10.2@110.871,50.546 ; v1(110.998,90.297) C10.2@110.998,90.551
  Bottom Layer w0.5: C1.1@75.438,37.973 77.724,37.973 77.978,37.973 78.74,37.211 83.82,37.211 5VDC.1@85.344,38.735 ; C1.1@75.565,77.978 77.851,77.978 78.105,77.978 78.867,77.216 83.947,77.216 5VDC.1@85.471,78.74 ; C1.1@113.919,37.973 116.205,37.973 116.459,37.973 117.221,37.211 122.301,37.211 5VDC.1@123.825,38.735 ; C1.1@114.046,77.978 116.332,77.978 116.586,77.978 117.348,77.216 122.428,77.216 5VDC.1@123.952,78.74
  other v1: 61.976,44.069 64.516,44.069 100.457,44.069 102.997,44.069 68.961,48.006 71.755,48.006 107.442,48.006 110.236,48.006 68.326,61.468 106.807,61.468 86.741,62.484 125.222,62.484 60.706,62.738 62.484,62.738 99.187,62.738 100.965,62.738 62.103,84.074 64.643,84.074 100.584,84.074 103.124,84.074 69.088,88.011 71.882,88.011 107.569,88.011 110.363,88.011 68.453,101.473 106.934,101.473 86.868,102.489 125.349,102.489 60.833,102.743 62.611,102.743 99.314,102.743 101.092,102.743
  other v2: 85.852,44.196 124.333,44.196 85.979,84.201 124.46,84.201
INT1_RP21: MRF24J40MB.5 U1.4 | length 79.9
  Top Layer w0.3: U1.4@76.924,48.423 85.344,48.423 85.725,48.804 85.725,54.991 84.836,55.88 83.947,55.88 82.677,57.15 MRF24J40MB.5@81.788,57.15 ; U1.4@77.051,88.428 85.471,88.428 85.852,88.809 85.852,94.996 84.963,95.885 84.074,95.885 82.804,97.155 MRF24J40MB.5@81.915,97.155 ; U1.4@115.405,48.423 123.825,48.423 124.206,48.804 124.206,54.991 123.317,55.88 122.428,55.88 121.158,57.15 MRF24J40MB.5@120.269,57.15 ; U1.4@115.532,88.428 123.952,88.428 124.333,88.809 124.333,94.996 123.444,95.885 122.555,95.885 121.285,97.155 MRF24J40MB.5@120.396,97.155
LED1: R4.2 U1.33 | length 49.1
  Top Layer w0.2: R4.2@54.61,56.261 v1(54.737,56.134) ; R4.2@54.737,96.266 v1(54.864,96.139) ; R4.2@93.091,56.261 v1(93.218,56.134) ; R4.2@93.218,96.266 v1(93.345,96.139)
  Top Layer w0.3: v1(65.024,55.753) 65.824,54.953 U1.33@65.824,54.423 ; v1(65.151,95.758) 65.951,94.958 U1.33@65.951,94.428 ; v1(103.505,55.753) 104.305,54.953 U1.33@104.305,54.423 ; v1(103.632,95.758) 104.432,94.958 U1.33@104.432,94.428
  Bottom Layer w0.2: v1(54.737,56.134) v1@55.118,55.753 ; v1(54.864,96.139) v1@55.245,95.758 ; v1(93.218,56.134) v1@93.599,55.753 ; v1(93.345,96.139) v1@93.726,95.758
  Bottom Layer w0.3: v1@55.245,56.007 v1@65.151,56.007 ; v1@55.372,96.012 v1@65.278,96.012 ; v1@93.726,56.007 v1@103.632,56.007 ; v1@93.853,96.012 v1@103.759,96.012
NetC9_1: C9.1 U1.56 | length 45.4
  Top Layer w0.3: U1.56@71.124,45.123 71.124,43.557 71.882,42.799 78.613,42.799 C9.1@80.01,44.196 ; U1.56@71.251,85.128 71.251,83.562 72.009,82.804 78.74,82.804 C9.1@80.137,84.201 ; U1.56@109.605,45.123 109.605,43.557 110.363,42.799 117.094,42.799 C9.1@118.491,44.196 ; U1.56@109.732,85.128 109.732,83.562 110.49,82.804 117.221,82.804 C9.1@118.618,84.201
NetD1_1: D1.1 R4.1 | length 9.7
  Top Layer w0.2: R4.1@54.61,58.293 D1.1@54.61,60.706 ; R4.1@54.737,98.298 D1.1@54.737,100.711 ; R4.1@93.091,58.293 D1.1@93.091,60.706 ; R4.1@93.218,98.298 D1.1@93.218,100.711
NetR1_1: R1.1 R2.1 SW_RST.2 | length 25.9
  Top Layer w0.3: R1.1@80.01,64.77 80.01,66.548 80.645,67.183 SW_RST.2@84.455,67.183 ; R1.1@80.137,104.775 80.137,106.553 80.772,107.188 SW_RST.2@84.582,107.188 ; R1.1@118.491,64.77 118.491,66.548 119.126,67.183 SW_RST.2@122.936,67.183 ; R1.1@118.618,104.775 118.618,106.553 119.253,107.188 SW_RST.2@123.063,107.188
OSCI: C12.2 U1.39 Y1.1 | length 55.7
  Top Layer w0.3: C12.2@64.516,62.738 64.262,62.484 64.262,58.801 63.373,57.912 63.373,51.943 63.893,51.423 U1.39@65.824,51.423 ; C12.2@64.643,102.743 64.389,102.489 64.389,98.806 63.5,97.917 63.5,91.948 64.02,91.428 U1.39@65.951,91.428 ; C12.2@102.997,62.738 102.743,62.484 102.743,58.801 101.854,57.912 101.854,51.943 102.374,51.423 U1.39@104.305,51.423 ; C12.2@103.124,102.743 102.87,102.489 102.87,98.806 101.981,97.917 101.981,91.948 102.501,91.428 U1.39@104.432,91.428
OSCO: C11.2 U1.40 Y1.2 | length 64.5
  Top Layer w0.2: Y1.2@59.182,58.42 Y1.2@59.182,58.801 ; Y1.2@59.309,98.425 Y1.2@59.309,98.806 ; Y1.2@97.663,58.42 Y1.2@97.663,58.801 ; Y1.2@97.79,98.425 Y1.2@97.79,98.806
  Top Layer w0.3: C11.2@58.674,62.738 59.182,62.23 Y1.2@59.182,58.801 ; C11.2@58.801,102.743 59.309,102.235 Y1.2@59.309,98.806 ; Y1.2@59.182,58.42 62.738,54.864 62.738,51.689 63.504,50.923 U1.40@65.824,50.923 ; Y1.2@59.309,98.425 62.865,94.869 62.865,91.694 63.631,90.928 U1.40@65.951,90.928 ; C11.2@97.155,62.738 97.663,62.23 Y1.2@97.663,58.801 ; C11.2@97.282,102.743 97.79,102.235 Y1.2@97.79,98.806 ; Y1.2@97.663,58.42 101.219,54.864 101.219,51.689 101.985,50.923 U1.40@104.305,50.923 ; Y1.2@97.79,98.425 101.346,94.869 101.346,91.694 102.112,90.928 U1.40@104.432,90.928
PGC: ICSP.5 U1.15 | length 94.3
  Top Layer w0.3: ICSP.5@67.183,70.358 69.977,67.564 73.025,67.564 76.2,64.389 76.2,55.372 75.565,54.737 75.565,53.923 U1.15@76.924,53.923 ; ICSP.5@67.31,110.363 70.104,107.569 73.152,107.569 76.327,104.394 76.327,95.377 75.692,94.742 75.692,93.928 U1.15@77.051,93.928 ; ICSP.5@105.664,70.358 108.458,67.564 111.506,67.564 114.681,64.389 114.681,55.372 114.046,54.737 114.046,53.923 U1.15@115.405,53.923 ; ICSP.5@105.791,110.363 108.585,107.569 111.633,107.569 114.808,104.394 114.808,95.377 114.173,94.742 114.173,93.928 U1.15@115.532,93.928
PGD: ICSP.4 U1.16 | length 78.6
  Top Layer w0.3: ICSP.4@69.723,70.358 71.882,68.199 73.152,68.199 76.924,64.427 U1.16@76.924,54.423 ; ICSP.4@69.85,110.363 72.009,108.204 73.279,108.204 77.051,104.432 U1.16@77.051,94.428 ; ICSP.4@108.204,70.358 110.363,68.199 111.633,68.199 115.405,64.427 U1.16@115.405,54.423 ; ICSP.4@108.331,110.363 110.49,108.204 111.76,108.204 115.532,104.432 U1.16@115.532,94.428
RB10: R3.2 U1.23 | length 15.4
  Top Layer w0.3: R3.2@70.612,59.436 70.612,58.928 72.124,57.416 U1.23@72.124,56.223 ; R3.2@70.739,99.441 70.739,98.933 72.251,97.421 U1.23@72.251,96.228 ; R3.2@109.093,59.436 109.093,58.928 110.605,57.416 U1.23@110.605,56.223 ; R3.2@109.22,99.441 109.22,98.933 110.732,97.421 U1.23@110.732,96.228
RSTMRF: MRF24J40MB.3 U1.1 | length 118.5
  Top Layer w0.3: U1.1@76.924,46.923 86.801,46.923 87.384,47.506 87.384,59.864 86.288,60.96 83.058,60.96 MRF24J40MB.3@81.788,59.69 ; U1.1@77.051,86.928 86.928,86.928 87.511,87.511 87.511,99.869 86.415,100.965 83.185,100.965 MRF24J40MB.3@81.915,99.695 ; U1.1@115.405,46.923 125.282,46.923 125.865,47.506 125.865,59.864 124.769,60.96 121.539,60.96 MRF24J40MB.3@120.269,59.69 ; U1.1@115.532,86.928 125.409,86.928 125.992,87.511 125.992,99.869 124.896,100.965 121.666,100.965 MRF24J40MB.3@120.396,99.695
SCK1_RP26: MRF24J40MB.9 U1.5 | length 24.7
  Top Layer w0.3: U1.5@76.924,48.923 78.641,48.923 MRF24J40MB.9@81.788,52.07 ; U1.5@77.051,88.928 78.768,88.928 MRF24J40MB.9@81.915,92.075 ; U1.5@115.405,48.923 117.122,48.923 MRF24J40MB.9@120.269,52.07 ; U1.5@115.532,88.928 117.249,88.928 MRF24J40MB.9@120.396,92.075
SCK2_RP3: 25LC256.6 U1.44 | length 17.9
  Top Layer w0.3: 25LC256.6@61.468,48.641 61.75,48.923 U1.44@65.824,48.923 ; 25LC256.6@61.595,88.646 61.877,88.928 U1.44@65.951,88.928 ; 25LC256.6@99.949,48.641 100.231,48.923 U1.44@104.305,48.923 ; 25LC256.6@100.076,88.646 100.358,88.928 U1.44@104.432,88.928
SCL1: SHT_CON.2 U1.37 | length 133.2
  Top Layer w0.2: SHT_CON.2@59.436,70.358 59.436,68.453 63.246,64.643 65.202,64.643 ; SHT_CON.2@59.563,110.363 59.563,108.458 63.373,104.648 65.329,104.648 ; SHT_CON.2@97.917,70.358 97.917,68.453 101.727,64.643 103.683,64.643 ; SHT_CON.2@98.044,110.363 98.044,108.458 101.854,104.648 103.81,104.648
  Top Layer w0.3: SHT_CON.2@59.486,70.308 59.486,68.453 63.246,64.693 65.152,64.693 65.202,64.643 66.852,62.993 66.852,55.322 67.536,54.638 67.536,52.423 U1.37@65.824,52.423 ; SHT_CON.2@59.613,110.313 59.613,108.458 63.373,104.698 65.279,104.698 65.329,104.648 66.979,102.998 66.979,95.327 67.663,94.643 67.663,92.428 U1.37@65.951,92.428 ; SHT_CON.2@97.967,70.308 97.967,68.453 101.727,64.693 103.633,64.693 103.683,64.643 105.333,62.993 105.333,55.322 106.017,54.638 106.017,52.423 U1.37@104.305,52.423 ; SHT_CON.2@98.094,110.313 98.094,108.458 101.854,104.698 103.76,104.698 103.81,104.648 105.46,102.998 105.46,95.327 106.144,94.643 106.144,92.428 U1.37@104.432,92.428
SDA1: SHT_CON.3 U1.36 | length 104.1
  Top Layer w0.3: SHT_CON.3@56.896,70.358 56.896,68.649 61.352,64.193 64.916,64.193 66.352,62.757 66.352,58.732 63.881,56.261 63.881,53.594 64.552,52.923 U1.36@65.824,52.923 ; SHT_CON.3@57.023,110.363 57.023,108.654 61.479,104.198 65.043,104.198 66.479,102.762 66.479,98.737 64.008,96.266 64.008,93.599 64.679,92.928 U1.36@65.951,92.928 ; SHT_CON.3@95.377,70.358 95.377,68.649 99.833,64.193 103.397,64.193 104.833,62.757 104.833,58.732 102.362,56.261 102.362,53.594 103.033,52.923 U1.36@104.305,52.923 ; SHT_CON.3@95.504,110.363 95.504,108.654 99.96,104.198 103.524,104.198 104.96,102.762 104.96,98.737 102.489,96.266 102.489,93.599 103.16,92.928 U1.36@104.432,92.928
SDI1_RP27: MRF24J40MB.8 U1.8 | length 48.3
  Top Layer w0.3: U1.8@76.924,50.423 78.49,50.423 79.629,51.562 79.629,54.61 81.026,56.007 82.931,56.007 MRF24J40MB.8@84.328,54.61 ; U1.8@77.051,90.428 78.617,90.428 79.756,91.567 79.756,94.615 81.153,96.012 83.058,96.012 MRF24J40MB.8@84.455,94.615 ; U1.8@115.405,50.423 116.971,50.423 118.11,51.562 118.11,54.61 119.507,56.007 121.412,56.007 MRF24J40MB.8@122.809,54.61 ; U1.8@115.532,90.428 117.098,90.428 118.237,91.567 118.237,94.615 119.634,96.012 121.539,96.012 MRF24J40MB.8@122.936,94.615
SDI2_RP4: 25LC256.2 U1.43 | length 50.8
  Top Layer w0.3: 25LC256.2@53.848,51.181 55.118,49.911 62.357,49.911 62.845,49.423 U1.43@65.824,49.423 ; 25LC256.2@53.975,91.186 55.245,89.916 62.484,89.916 62.972,89.428 U1.43@65.951,89.428 ; 25LC256.2@92.329,51.181 93.599,49.911 100.838,49.911 101.326,49.423 U1.43@104.305,49.423 ; 25LC256.2@92.456,91.186 93.726,89.916 100.965,89.916 101.453,89.428 U1.43@104.432,89.428
SDO1_RP19: MRF24J40MB.7 U1.6 | length 32.2
  Top Layer w0.3: U1.6@76.924,49.423 78.379,49.423 80.264,51.308 80.264,53.086 MRF24J40MB.7@81.788,54.61 ; U1.6@77.051,89.428 78.506,89.428 80.391,91.313 80.391,93.091 MRF24J40MB.7@81.915,94.615 ; U1.6@115.405,49.423 116.86,49.423 118.745,51.308 118.745,53.086 MRF24J40MB.7@120.269,54.61 ; U1.6@115.532,89.428 116.987,89.428 118.872,91.313 118.872,93.091 MRF24J40MB.7@120.396,94.615
SDO2_RP2: 25LC256.5 U1.42 | length 45.9
  Top Layer w0.2: 25LC256.5@61.214,46.101 25LC256.5@61.468,46.101 ; 25LC256.5@61.341,86.106 25LC256.5@61.595,86.106 ; 25LC256.5@99.695,46.101 25LC256.5@99.949,46.101 ; 25LC256.5@99.822,86.106 25LC256.5@100.076,86.106
  Top Layer w0.3: 25LC256.5@61.468,46.101 66.548,46.101 67.679,47.232 67.679,49.923 U1.42@65.824,49.923 ; 25LC256.5@61.595,86.106 66.675,86.106 67.806,87.237 67.806,89.928 U1.42@65.951,89.928 ; 25LC256.5@99.949,46.101 105.029,46.101 106.16,47.232 106.16,49.923 U1.42@104.305,49.923 ; 25LC256.5@100.076,86.106 105.156,86.106 106.287,87.237 106.287,89.928 U1.42@104.432,89.928
U1RX_RP22: U1.51 UART1.2 | length 21.8
  Top Layer w0.3: UART1.2@68.453,39.751 68.624,39.922 U1.51@68.624,45.123 ; UART1.2@68.58,79.756 68.751,79.927 U1.51@68.751,85.128 ; UART1.2@106.934,39.751 107.105,39.922 U1.51@107.105,45.123 ; UART1.2@107.061,79.756 107.232,79.927 U1.51@107.232,85.128
U1TX_RP25: U1.52 UART1.1 | length 24.8
  Top Layer w0.3: U1.52@69.124,45.123 69.124,42.89 71.12,40.894 UART1.1@71.12,39.751 ; U1.52@69.251,85.128 69.251,82.895 71.247,80.899 UART1.1@71.247,79.756 ; U1.52@107.605,45.123 107.605,42.89 109.601,40.894 UART1.1@109.601,39.751 ; U1.52@107.732,85.128 107.732,82.895 109.728,80.899 UART1.1@109.728,79.756
U2RX_RP24: U1.49 UART2.2 | length 53.4
  Top Layer w0.3: UART2.2@58.039,39.751 58.039,40.64 60.071,42.672 66.929,42.672 67.624,43.367 U1.49@67.624,45.123 ; UART2.2@58.166,79.756 58.166,80.645 60.198,82.677 67.056,82.677 67.751,83.372 U1.49@67.751,85.128 ; UART2.2@96.52,39.751 96.52,40.64 98.552,42.672 105.41,42.672 106.105,43.367 U1.49@106.105,45.123 ; UART2.2@96.647,79.756 96.647,80.645 98.679,82.677 105.537,82.677 106.232,83.372 U1.49@106.232,85.128
U2TX_RP23: U1.50 UART2.1 | length 43.9
  Top Layer w0.3: UART2.1@60.706,39.751 62.738,41.783 67.056,41.783 68.124,42.851 U1.50@68.124,45.123 ; UART2.1@60.833,79.756 62.865,81.788 67.183,81.788 68.251,82.856 U1.50@68.251,85.128 ; UART2.1@99.187,39.751 101.219,41.783 105.537,41.783 106.605,42.851 U1.50@106.605,45.123 ; UART2.1@99.314,79.756 101.346,81.788 105.664,81.788 106.732,82.856 U1.50@106.732,85.128
VPP: ICSP.1 R2.2 U1.7 | length 113.7
  Top Layer w0.3: v1(74.295,48.768) 75.45,49.923 U1.7@76.924,49.923 ; v1(74.422,88.773) 75.577,89.928 U1.7@77.051,89.928 ; ICSP.1@77.343,70.358 77.978,69.723 R2.2@77.978,66.548 ; ICSP.1@77.47,110.363 78.105,109.728 R2.2@78.105,106.553 ; v1(112.776,48.768) 113.931,49.923 U1.7@115.405,49.923 ; v1(112.903,88.773) 114.058,89.928 U1.7@115.532,89.928 ; ICSP.1@115.824,70.358 116.459,69.723 R2.2@116.459,66.548 ; ICSP.1@115.951,110.363 116.586,109.728 R2.2@116.586,106.553
  Bottom Layer w0.3: v1(74.295,48.768) 80.264,54.737 80.264,64.135 v1(77.851,66.548) ; v1(74.422,88.773) 80.391,94.742 80.391,104.14 v1(77.978,106.553) ; v1(112.776,48.768) 118.745,54.737 118.745,64.135 v1(116.332,66.548) ; v1(112.903,88.773) 118.872,94.742 118.872,104.14 v1(116.459,106.553)
WAKE: MRF24J40MB.4 U1.2 | length 91.6
  Top Layer w0.2: 86.04,47.423 86.11,47.423 86.185,47.498 ; 86.167,87.428 86.237,87.428 86.312,87.503 ; 124.521,47.423 124.591,47.423 124.666,47.498 ; 124.648,87.428 124.718,87.428 124.793,87.503
  Top Layer w0.3: U1.2@76.924,47.423 86.04,47.423 86.09,47.473 ; U1.2@77.051,87.428 86.167,87.428 86.217,87.478 ; MRF24J40MB.4@84.328,59.69 86.887,57.131 86.887,48.2 86.185,47.498 ; MRF24J40MB.4@84.455,99.695 87.014,97.136 87.014,88.205 86.312,87.503 ; U1.2@115.405,47.423 124.521,47.423 124.571,47.473 ; U1.2@115.532,87.428 124.648,87.428 124.698,87.478 ; MRF24J40MB.4@122.809,59.69 125.368,57.131 125.368,48.2 124.666,47.498 ; MRF24J40MB.4@122.936,99.695 125.495,97.136 125.495,88.205 124.793,87.503
pads on no net: LM1117.4 MRF24J40MB.10 MRF24J40MB.11 MRF24J40MB.12 U1.11 U1.12 U1.13 U1.14 U1.17 U1.18 U1.22 U1.24 U1.27 U1.28 U1.29 U1.30 U1.31 U1.32 U1.34 U1.35 U1.46 U1.47 U1.48 U1.53 U1.54 U1.55 U1.57 U1.58 U1.59 U1.60 U1.61 U1.62 U1.63 U1.64
copper on no net: | length 112.4
  Top Layer w0.254: 51.179,35.56 51.183,36.068 ; 51.306,75.565 51.31,76.073 ; 52.701,35.295 51.181,35.814 ; 52.708,36.311 51.181,35.814 ; 52.828,75.3 51.308,75.819 ; 52.835,76.316 51.308,75.819 ; 61.509,35.743 51.181,35.814 ; 61.636,75.748 51.308,75.819 ; 77.556,35.631 87.884,35.56 ; 77.683,75.636 88.011,75.565 ; 86.357,35.063 87.884,35.56 ; 86.364,36.079 87.884,35.56 ; 86.484,75.068 88.011,75.565 ; 86.491,76.084 88.011,75.565 ; 87.882,35.306 87.886,35.814 ; 88.009,75.311 88.013,75.819 ; 89.66,35.56 89.664,36.068 ; 89.787,75.565 89.791,76.073 ; 91.182,35.295 89.662,35.814 ; 91.189,36.311 89.662,35.814 ; 91.309,75.3 89.789,75.819 ; 91.316,76.316 89.789,75.819 ; 99.99,35.743 89.662,35.814 ; 100.117,75.748 89.789,75.819 ; 116.037,35.631 126.365,35.56 ; 116.164,75.636 126.492,75.565 ; 124.838,35.063 126.365,35.56 ; 124.845,36.079 126.365,35.56 ; 124.965,75.068 126.492,75.565 ; 124.972,76.084 126.492,75.565 ; 126.363,35.306 126.367,35.814 ; 126.49,75.311 126.494,75.819

## Polygon pours and split planes (outlines as drawn)
GND on Top Layer "Top Layer-No Net" (solid, pour order 6): 89.916,114.554 126.238,114.554 126.492,114.3 126.492,76.581 90.17,76.581 89.916,76.835
GND on Top Layer "Top Layer-No Net" (solid, pour order 6): 89.789,74.549 126.111,74.549 126.365,74.295 126.365,36.576 90.043,36.576 89.789,36.83
GND on Top Layer "Top Layer-No Net" (solid, pour order 6): 51.308,74.549 87.63,74.549 87.884,74.295 87.884,36.576 51.562,36.576 51.308,36.83
GND on Top Layer "Top Layer-No Net" (solid, pour order 6): 51.435,114.554 87.757,114.554 88.011,114.3 88.011,76.581 51.689,76.581 51.435,76.835
GND on Bottom Layer "Top Layer-No Net" (solid, pour order 8): 90.043,114.554 126.492,114.554 126.492,76.581 89.916,76.581
GND on Bottom Layer "Top Layer-No Net" (solid, pour order 8): 89.916,74.549 126.365,74.549 126.365,36.576 89.789,36.576
GND on Bottom Layer "Top Layer-No Net" (solid, pour order 8): 51.435,74.549 87.884,74.549 87.884,36.576 51.308,36.576
GND on Bottom Layer "Top Layer-No Net" (solid, pour order 8): 51.562,114.554 88.011,114.554 88.011,76.581 51.435,76.581
no net on Internal Plane 1 (split plane): 87.501,77.091 51.945,77.091 51.945,114.044 87.501,114.044
no net on Internal Plane 2 (split plane): 87.501,77.091 51.945,77.091 51.945,114.044 87.501,114.044

## Keep-outs
Keep-Out Layer:
  lines w0.3: 51.308,36.576 87.884,36.576 87.884,74.549 51.308,74.549 51.308,36.576 ; 51.435,76.581 51.435,114.554 88.011,114.554 88.011,76.581 51.435,76.581 ; 89.789,36.576 89.789,74.549 126.365,74.549 126.365,36.576 89.789,36.576 ; 89.916,76.581 126.492,76.581 126.492,114.554 89.916,114.554 89.916,76.581

## Other copper
Top Layer:
  text "36.704 (mm)" at 61.883,74.832 h1.52 r359.6
  text "36.704 (mm)" at 100.364,74.832 h1.52 r359.6
  text "36.704 (mm)" at 61.756,34.827 h1.52 r359.6
  text "36.704 (mm)" at 100.237,34.827 h1.52 r359.6

## Silkscreen, mask and mechanical layers (free items; w line width, h text height)
Drill Drawing:
  text ".LEGEND" at 93.88,81.28 h1.52
  text ".LEGEND" at 132.361,81.28 h1.52
  text "Drill Drawing." at 93.88,78.74 h1.52
  text "Drill Drawing." at 132.361,78.74 h1.52
  text ".LEGEND" at 93.753,41.275 h1.52
  text ".LEGEND" at 132.234,41.275 h1.52
  text "Drill Drawing." at 93.753,38.735 h1.52
  text "Drill Drawing." at 132.234,38.735 h1.52

## Dimensions
89.916,76.581 to 126.492,76.581 on Mechanical 1
89.916,76.581 to 89.916,114.554 on Mechanical 1
89.789,36.576 to 89.789,74.549 on Mechanical 1
89.789,36.576 to 126.365,36.576 on Mechanical 1
51.308,36.576 to 87.884,36.576 on Mechanical 1
51.308,36.576 to 51.308,74.549 on Mechanical 1
51.435,76.581 to 51.435,114.554 on Mechanical 1
51.435,76.581 to 88.011,76.581 on Mechanical 1

## Text inside footprints (layer, text, board x,y; h text height)
MRF24J40MB: Top Overlay "12" at 122.428,87.503 h1.27 r270; Top Overlay "1" at 119.888,86.487 h1.27 r270; Top Overlay "1" at 119.888,87.503 h1.27 r270; Top Overlay "1" at 119.888,104.775 h1.27 r270; Top Overlay "2" at 122.428,104.775 h1.27 r270
MRF24J40MB: Top Overlay "12" at 122.301,47.498 h1.27 r270; Top Overlay "1" at 119.761,46.482 h1.27 r270; Top Overlay "1" at 119.761,47.498 h1.27 r270; Top Overlay "1" at 119.761,64.77 h1.27 r270; Top Overlay "2" at 122.301,64.77 h1.27 r270
MRF24J40MB: Top Overlay "12" at 83.82,47.498 h1.27 r270; Top Overlay "1" at 81.28,46.482 h1.27 r270; Top Overlay "1" at 81.28,47.498 h1.27 r270; Top Overlay "1" at 81.28,64.77 h1.27 r270; Top Overlay "2" at 83.82,64.77 h1.27 r270
MRF24J40MB: Top Overlay "12" at 83.947,87.503 h1.27 r270; Top Overlay "1" at 81.407,86.487 h1.27 r270; Top Overlay "1" at 81.407,87.503 h1.27 r270; Top Overlay "1" at 81.407,104.775 h1.27 r270; Top Overlay "2" at 83.947,104.775 h1.27 r270